# EAGLE board unicorder-temp-mk-2.0 (EAGLE 6.5.0)
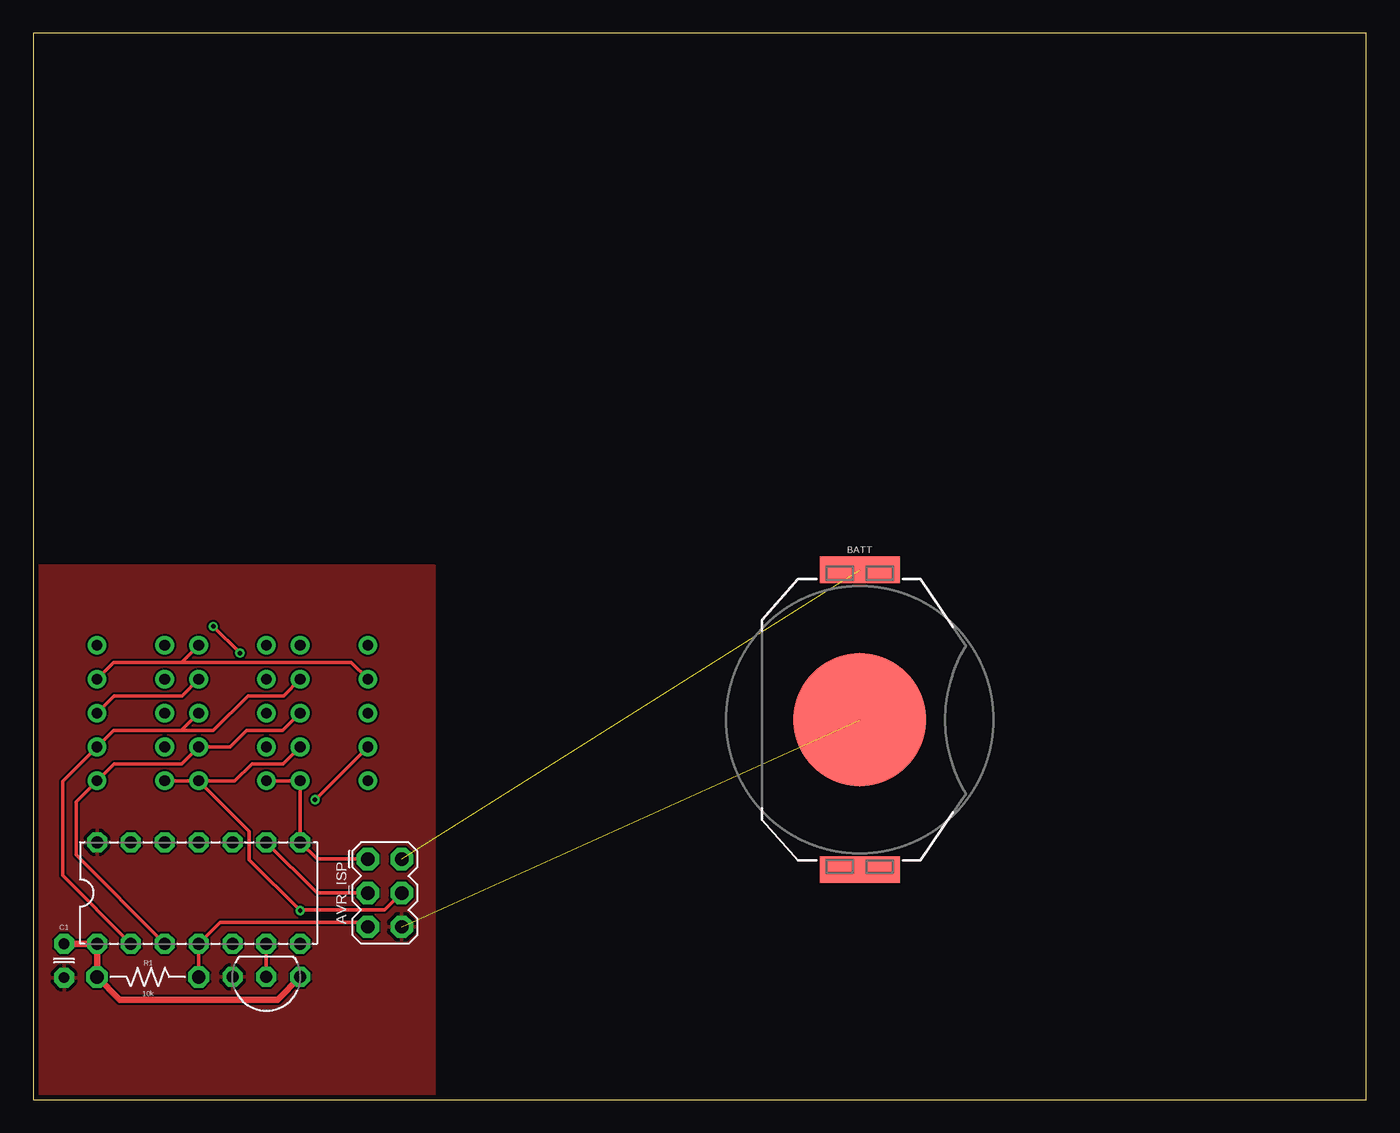
[diagram p0: board, top side]
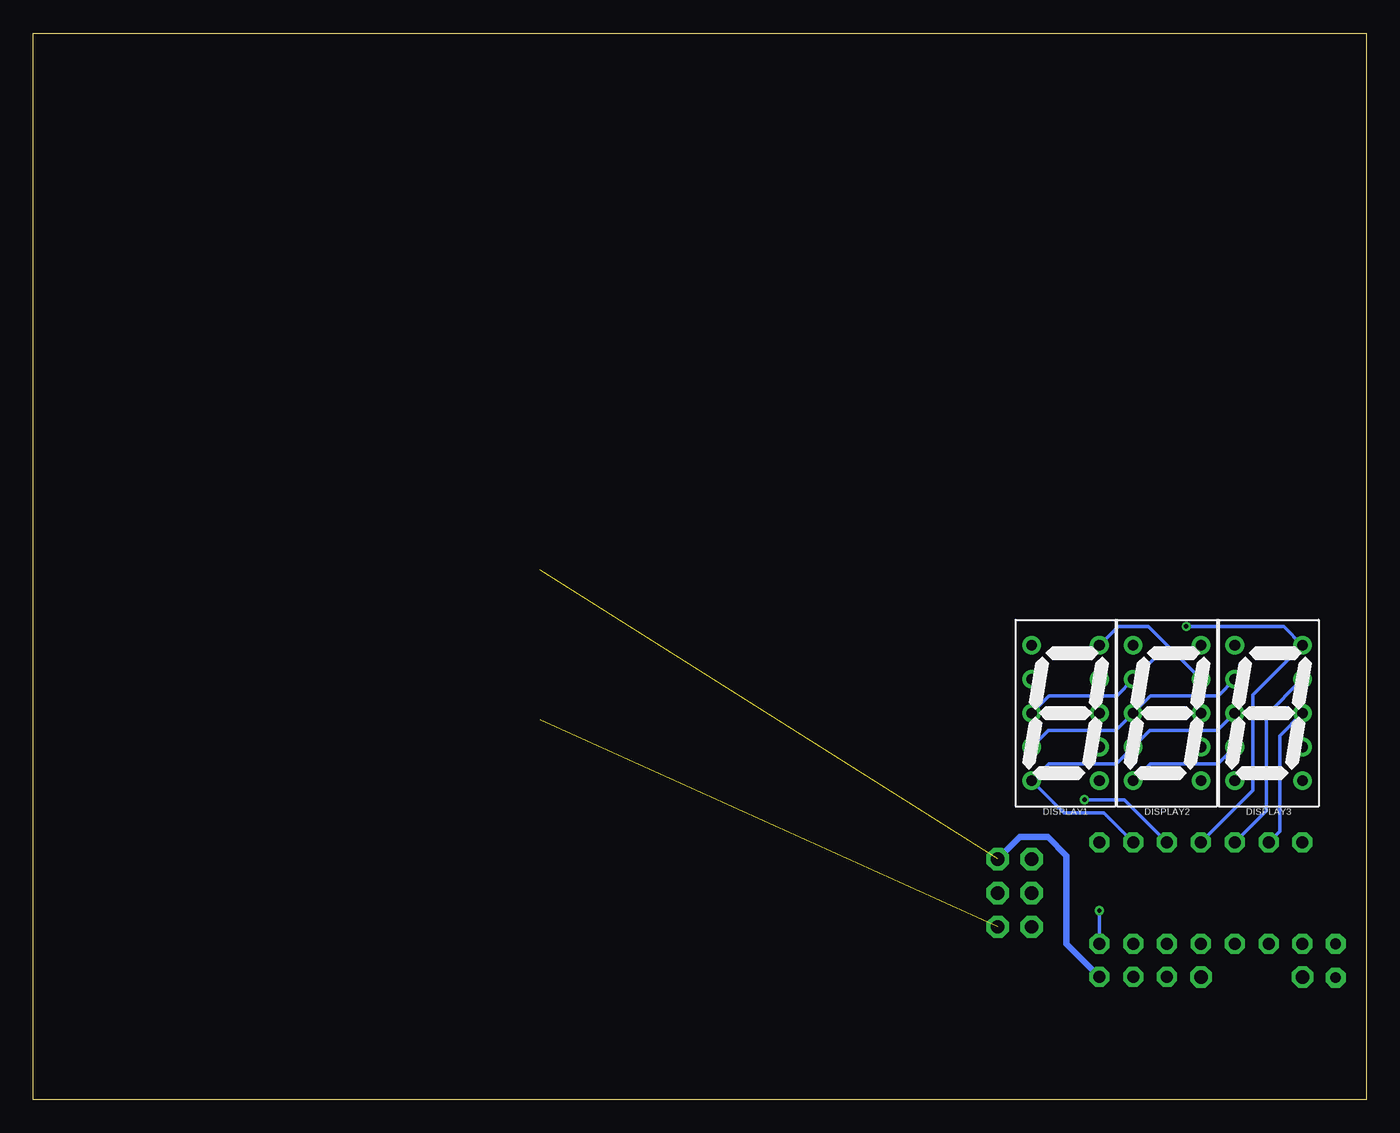
[diagram p1: board, bottom side, seen from below]

Size 100 x 80 mm. Coordinates in mm from the lower left corner, seen from the top.
Outline: 0,0 100,0 100,80 0,80 0,0
Copper layers (1*16): Top 0.0356mm / dielectric 1.5011mm / Bottom 0.0356mm
Design rules "LaenPCBOrder_2": minimum track width 6mil, minimum drill 13mil, track to track 6mil, track to pad 6mil, pad to pad 6mil, via to via 6mil, smd to smd 6mil, copper to edge 15mil, drill to drill 6mil, minimum pad ring 7mil, minimum via ring 7mil, stop-mask expansion 3mil, vias tented up to drill 20mil, thermal gap 10mil

## Footprints (pad centres in the part's own frame; a part is rotated, then mirrored left to right if it is on the bottom)
2X3 = drill 1 pad 1.676 octagon: 1 -2.54,-1.27; 2 -2.54,1.27; 3 0,-1.27; 4 0,1.27; 5 2.54,-1.27; 6 2.54,1.27
BATTCON_20MM_MINE = smd 10 x 10: BOTTOM 0,0 | smd 6 x 2: TOP@1 0,11.25; TOP@2 0,-11.25
C025-024X044 = drill 0.813 pad 1.5 octagon: 1 -1.27,0; 2 1.27,0
7SEG_1DIG_10MM = drill 0.8 pad 1.4: 1 -2.54,5.08; 2 -2.54,2.54; 3 -2.54,0; 4 -2.54,-2.54; 5 -2.54,-5.08; 6 2.54,-5.08; 7 2.54,-2.54; 8 2.54,0; 9 2.54,2.54; 10 2.54,5.08
DIL14 = drill 0.9 pad 1.5 octagon: 1 -7.62,-3.81; 2 -5.08,-3.81; 3 -2.54,-3.81; 4 0,-3.81; 5 2.54,-3.81; 6 5.08,-3.81; 7 7.62,-3.81; 8 7.62,3.81; 9 5.08,3.81; 10 2.54,3.81; 11 0,3.81; 12 -2.54,3.81; 13 -5.08,3.81; 14 -7.62,3.81
TO-92-AMMO = drill 0.9 pad 1.5 octagon: 1 -2.54,0; 2 0,0; 3 2.54,0
RESISTOR-AXIAL-PTH-7.62MM = drill 1 pad 1.6 octagon: P$1 -3.81,0; P$2 3.81,0

## Placement (x,y rotation side)
AVR_ISP  AVR_SPI_PRG_6PTH  [2X3]  26.37,15.5 270 top
BATT  CR2032  [BATTCON_20MM_MINE]  62,28.5 0 top
C1  0.1uF  [C025-024X044]  2.3,10.42 270 top
DISPLAY1  7SEG_1DIG-2  [7SEG_1DIG_10MM]  22.56,29 0 bottom
DISPLAY2  7SEG_1DIG-2  [7SEG_1DIG_10MM]  14.94,29 0 bottom
DISPLAY3  7SEG_1DIG-2  [7SEG_1DIG_10MM]  7.32,29 0 bottom
FRAME1  [DUMMY]  0,0 0 top
IC1  ATTINY84  [DIL14]  12.4,15.5 0 top
IC2  TMP36  [TO-92-AMMO]  17.48,9.2 180 top
R1  10k  [RESISTOR-AXIAL-PTH-7.62MM]  8.59,9.2 180 top

## Library data of the parts
AVR_ISP BATT C1 DISPLAY1-DISPLAY3 IC1 IC2 R1 = A_butts
FRAME1 = A_butts; DESIGNER: Nobody; VERSION: v01

## Nets
ADC7: IC1.6 IC2.2
GND: AVR_ISP.6 BATT.BOTTOM C1.2 IC1.14 IC2.3
PA0: DISPLAY1.10 DISPLAY2.9 DISPLAY3.8 IC1.13
PA1: DISPLAY1.2 DISPLAY2.10 DISPLAY3.9 IC1.12
PA2: DISPLAY1.3 DISPLAY2.2 DISPLAY3.10 IC1.11
PA3: DISPLAY1.4 DISPLAY2.3 DISPLAY3.2 IC1.10
PA4: AVR_ISP.3 DISPLAY1.5 DISPLAY2.4 DISPLAY3.3 IC1.9
PA5: AVR_ISP.1 DISPLAY1.6 DISPLAY2.5 DISPLAY3.4 IC1.8
PA6: AVR_ISP.4 DISPLAY1.7 DISPLAY2.6 DISPLAY3.5 IC1.7
PB0: DISPLAY1.9 DISPLAY2.8 DISPLAY3.7 IC1.2
PB1: DISPLAY1.8 DISPLAY2.7 DISPLAY3.6 IC1.3
RST: AVR_ISP.5 IC1.4 R1.P$1
VCC: AVR_ISP.2 BATT.TOP@1 C1.1 IC1.1 IC2.1 R1.P$2

## Tracks (layer width: path | path; a pad name or v marks a point on that pad's centre or on a via)
ADC7
  Top 0.25: IC2.2 IC1.6
GND  (1 unrouted)
  pour Top: -0.1,-0.1 -0.1,40.1 30.1,40.1 30.1,-0.1
PA0
  Top 0.25: DISPLAY3.8 6.08,30.3 11.16,30.3 DISPLAY2.9
  Bottom 0.25: DISPLAY2.9 16.36,35.5 18.6,35.5 DISPLAY1.10 | DISPLAY3.8 6.5,27.28 6.5,20.13 IC1.13
PA1
  Top 0.25: DISPLAY3.9 6.04,32.8 11.12,32.8 | 11.12,32.8 23.84,32.8 DISPLAY1.2 | DISPLAY2.10 11.12,32.8
  Bottom 0.25: DISPLAY3.9 7.5,28.82 7.5,21.67 IC1.12
PA2  (via drill 0.33)
  Top 0.25: v13.5,35.5 v15.5,33.5
  Bottom 0.25: v13.5,35.5 6.2,35.5 DISPLAY3.10 8.5,30.36 8.5,23.21 IC1.11 | v15.5,33.5 17.46,31.54 DISPLAY2.2 18.72,30.3 23.8,30.3 DISPLAY1.3
PA3  (via drill 0.33)
  Top 0.25: v21.14,22.5 DISPLAY1.4
  Bottom 0.25: DISPLAY3.2 11.1,30.3 16.18,30.3 DISPLAY2.3 18.78,27.7 23.86,27.7 DISPLAY1.4 | IC1.10 18.13,22.5 v21.14,22.5
PA4
  Top 0.25: AVR_ISP.3 21.29,15.5 IC1.9
  Bottom 0.25: DISPLAY3.3 11.16,27.7 16.24,27.7 DISPLAY2.4 18.74,25.2 23.82,25.2 DISPLAY1.5 22.68,21.5 19.67,21.5 IC1.9
PA5
  Top 0.25: DISPLAY2.5 DISPLAY1.6 IC1.8 21.29,18.04 AVR_ISP.1
  Bottom 0.25: DISPLAY3.4 11.12,25.2 16.2,25.2 DISPLAY2.5
PA6  (via drill 0.33)
  Top 0.25: DISPLAY3.5 DISPLAY2.6 | DISPLAY2.6 15.12,23.92 16.4,25.2 18.76,25.2 DISPLAY1.7 | DISPLAY2.6 16.2,20.12 16.2,18 v20.02,14.18 20.07,14.23 26.37,14.23 AVR_ISP.4
  Bottom 0.25: IC1.7 v20.02,14.18
PB0
  Top 0.25: 11.1,27.7 6.02,27.7 DISPLAY3.7 2.2,23.88 2.2,16.81 IC1.2 | 11.1,27.7 13.5,27.7 16.1,30.3 18.78,30.3 DISPLAY1.9 | DISPLAY2.8 11.1,27.7
PB1
  Top 0.25: DISPLAY1.8 18.72,27.7 16,27.7 14.76,26.46 DISPLAY2.7 11.14,25.2 6.06,25.2 DISPLAY3.6 3.2,22.34 3.2,18.35 IC1.3
RST
  Top 0.25: AVR_ISP.5 24.76,13.3 14.01,13.3 IC1.4 R1.P$1
VCC  (1 unrouted)
  Top 0.5: C1.1 IC1.1 R1.P$2 6.48,7.5 18.32,7.5 IC2.1
  Bottom 0.5: IC2.1 22.5,11.68 22.5,18.3 23.9,19.7 25.98,19.7 AVR_ISP.2